# Altium PCB QN9080.PcbDoc
Units mm, origin at the board's own origin, x right, y up, seen from the top; angles counter-clockwise.
Board outline 37.46 x 44.96 mm, 2 copper layers (Top Layer, Bottom Layer); 28 components, 24 nets, 128 pads, 120 vias.
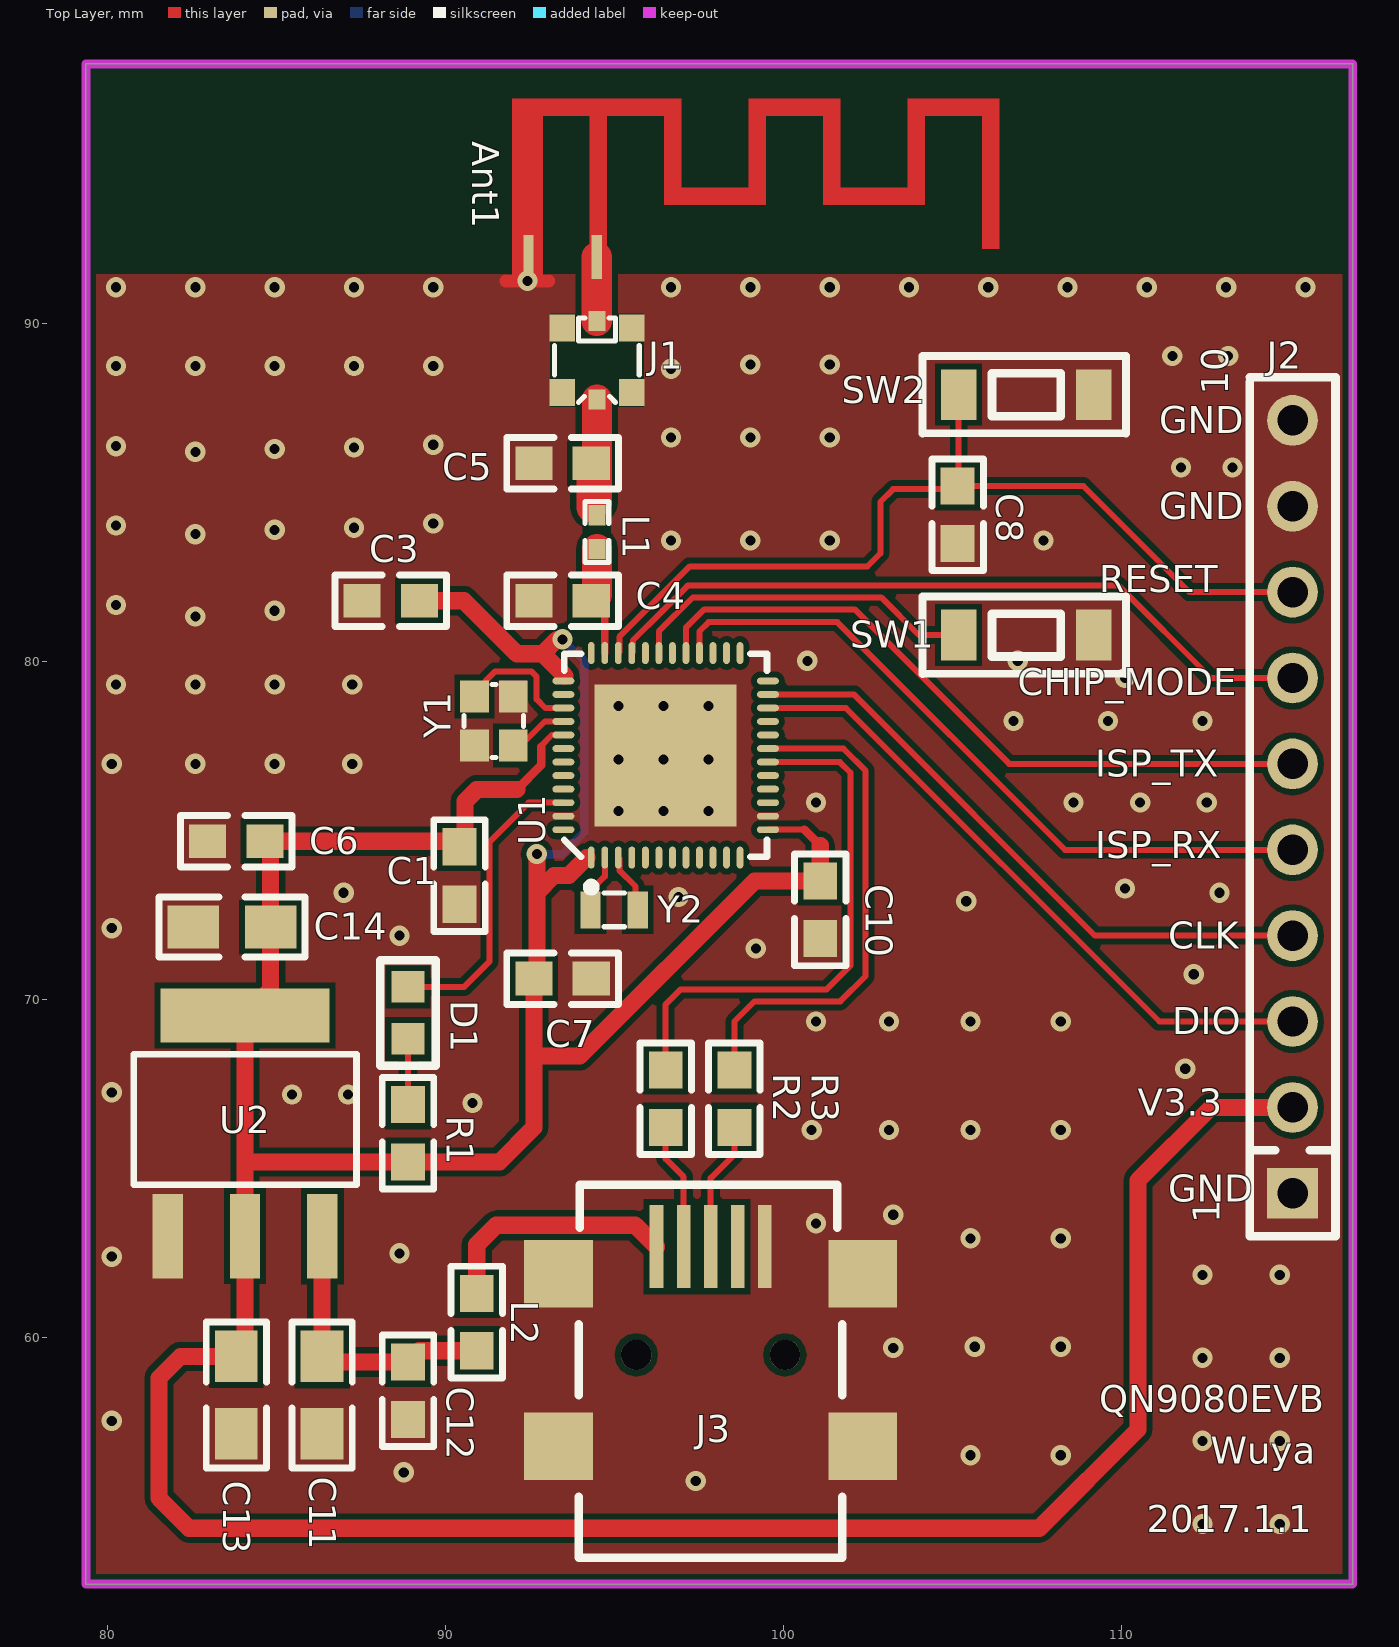
[diagram p0: Top Layer view]
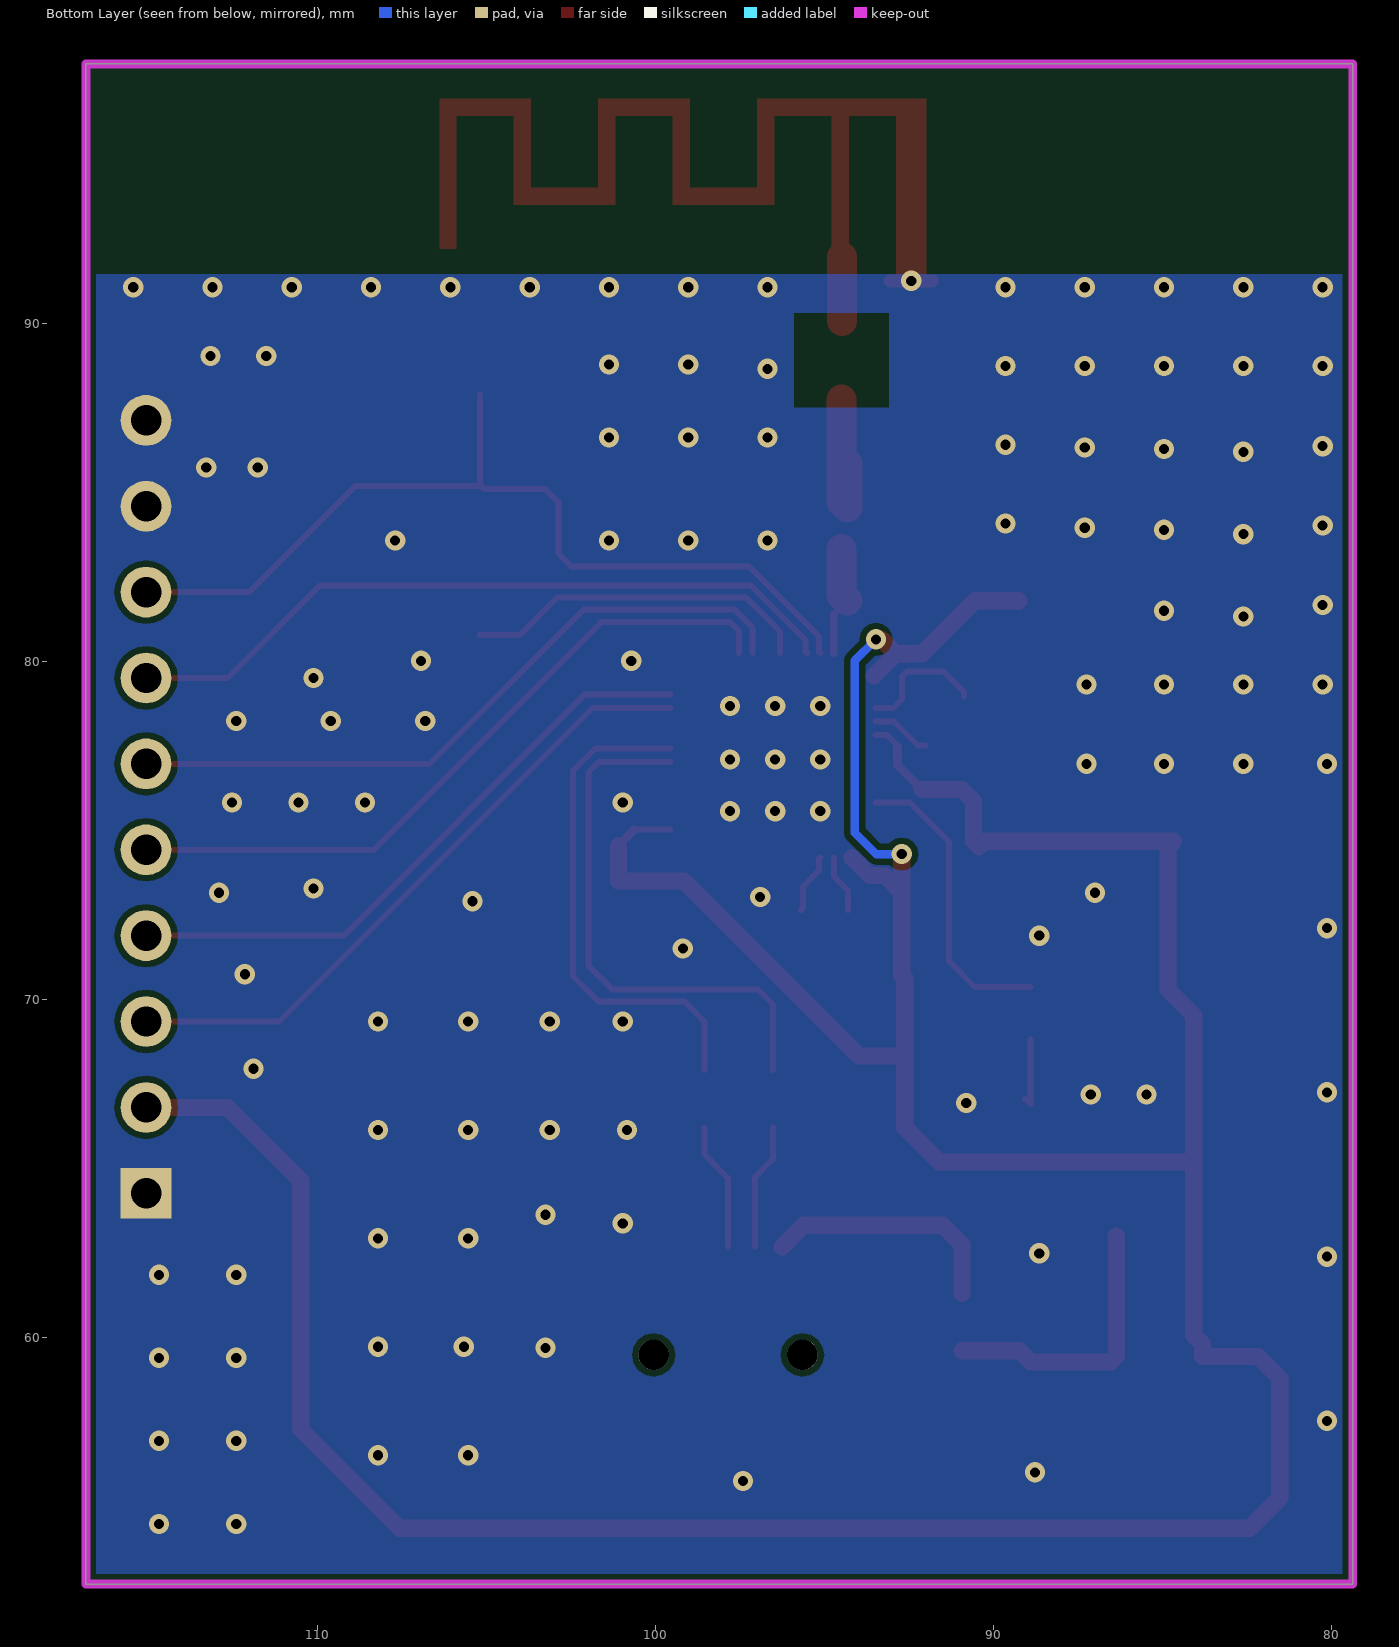
[diagram p1: Bottom Layer view, seen from below]

## Layer stack, top to bottom
Top Layer: signal copper 0.0356
Dielectric: dielectric 0.32, FR-4, Dk 4.8
Bottom Layer: signal copper 0.0356

## Board outline
79.375,97.663 79.375,52.705 116.84,52.705 116.84,97.663

## Design rules (kind name [scope] priority, off if disabled: settings)
Clearance Clearance_1 [(InPolygon)] p1: gap=0.178
Clearance [All] p2: gap=0.178
Length "InNet('USB_DP') Or InNet('USB_DM')" [InNet('USB_DP') Or InNet('USB_DM')] p1: maxlimit=17.78 minlimit=0
MinimumSolderMaskSliver [All] p1: minsoldermaskwidth=0
PolygonConnect [All] p1: connectstyle=Direct reliefconductorwidth=0.254 reliefentries=4 polygonreliefangle="90 Angle"
RoutingVias [All] p1: holewidth=0.711 width=1.27 viastyle="Through Hole" minholewidth=0.711 minwidth=1.27 maxholewidth=0.711 maxwidth=1.27
SilkToSilkClearance [All] p1: silktosilkclearance=0
SilkscreenOverComponentPads [All] p1: minsilkscreentomaskgap=0
SolderMaskExpansion [All] p1: expansion=0.102
TestPointUsage [All] p1: valid=0 allowmultiple=FALSE
Testpoint [All] p1: side=15 testpointundercomponent=TRUE minsize=1.016 maxsize=2.54 preferedsize=1.524 minholesize=0 maxholesize=1.016 preferedholesize=0.813 testpointgrid=0.025 style=1023 order=0123456789
Width [All] p1: maxlimit=1.27 minlimit=0.127 preferedwidth=0.254 minimp=50.000000 maximp=50.000000 favimp=50.000000
21 further rules are at their usual default settings.

## Components (designator, comment, footprint, x,y, rotation, side; value= is the part's Value field where it differs from the comment)
Ant1 "Atenna" ANTENNA_IIFA_1 93.472,91.948 r270 top
C1 "0.1uF" RCL_0603 90.424,73.66 r90 top
C3 "0.1uF" RCL_0603 88.392,81.788 r0 top
C4 "1.8pF" RCL_0603 93.472,81.788 r0 top
C5 "1.8pF" RCL_0603 93.472,85.852 r0 top
C6 "4.7uF" RCL_0603 83.82,74.676 r0 top
C7 "0.1uF" RCL_0603 93.472,70.612 r180 top
C8 "0.1uF" RCL_0603 105.156,84.328 r90 top
C10 "0.1uF" RCL_0603 101.092,72.644 r90 top
C11 "10uF" RCL_0805 86.36,59.436 r270 top
C12 "0.1uF" RCL_0603 88.9,58.42 r90 top
C13 "10uF" RCL_0805 83.82,59.436 r270 top
C14 "10uF" RCL_0805 84.836,72.136 r180 top
D1 "LED" LED_0603 88.9,69.596 r270 top
J1 "MM8130-2600" COAXIAL-SWF 94.488,88.9 r180 top
J2 "CONN-10" HDR_1x10 113.792,75.692 r90 top
J3 "MiniUSB-AB-SMT" USB-Micro-B-RA-SMD-PiP 98.044,57.912 r180 top
L1 "3.3nH" RCL_0402 94.488,83.82 r90 top
L2 "INDUCTOR" RCL_0603 90.932,60.452 r270 top
R1 "470Ω" RCL_0603 88.9,66.04 r270 top
R2 "22Ω" RCL_0603 96.52,67.056 r270 top
R3 "22Ω" RCL_0603 98.552,67.056 r270 top
SW1 "Button" E-Switch 107.188,80.772 r0 top
SW2 "Button" E-Switch 107.188,87.884 r0 top
U1 "QN9080" QN9080QFN48pin 96.52,77.216 r90 top
U2 "AM1117" SOT-223 81.788,62.992 r90 top
Y1 "32M" BT-XTAL_2016 91.44,78.232 r90 top
Y2 "32.768Khz" XTAL32K_2012 94.996,72.644 r180 top

## Footprints (in the part's own frame and the unit in brackets; to place one, negate y for a bottom-side part, rotate by r counter-clockwise, add the part's x,y. Pads: shape width x height; smd on the part's side, far side on the other; paste and mask are expansions set on the pad)
ANTENNA_IIFA_1 [mm]
  rect 1.3x0.3 smd paste+0 mask-0.3: 1(0,1.01) 2(0,-1.01)
  Top Layer region: -4.69,8.21 -1.55,8.21 -1.55,7.71 -4.69,7.71
  Top Layer region: -4.69,5.51 -4.19,5.51 -4.19,8.21 -4.69,8.21
  Top Layer region: -2.05,3.01 -1.55,3.01 -1.55,6.01 -2.05,6.01
  Top Layer region: -1.55,3.01 -4.69,3.01 -4.69,3.51 -1.55,3.51
  Top Layer region: -2.05,7.71 -1.55,7.71 -1.55,10.71 -2.05,10.71
  Top Layer region: -1.55,10.71 -4.69,10.71 -4.69,10.21 -1.55,10.21
  Top Layer region: -4.69,10.21 -4.19,10.21 -4.19,12.91 -4.69,12.91
  Top Layer region: -1.55,6.01 -4.69,6.01 -4.69,5.51 -1.55,5.51
  Top Layer region: -4.69,-1.49 0.7,-1.49 0.7,-0.59 -4.69,-0.59
  Top Layer region: -4.69,12.91 -0.25,12.91 -0.25,12.41 -4.69,12.41
  Top Layer region: -4.69,0.81 0.7,0.81 0.7,1.31 -4.69,1.31
  Top Layer region: -4.69,-1.49 -4.19,-1.49 -4.19,3.51 -4.69,3.51
BT-XTAL_2016 [mm] "Crystal 2.0 x 1.6 mm"
  rect 0.95x0.85 smd: 1(-0.725,-0.575) 2(0.725,-0.575) 3(0.725,0.575) 4(-0.725,0.575)
  silkscreen extent -1.08,-0.88 1.08,0.88, body extent -1.05,-0.85 1.05,0.85, height 0.56
COAXIAL-SWF [mm]
  rect 0.5x0.58 smd: 1(0,1.16) 3(0,-1.16)
  rect 0.75x0.8 smd: 2(-1.025,0.95) 2(-1.025,-0.95) 2(1.025,0.95) 2(1.025,-0.95)
  Top Layer pour cut-out: 0.65,-0.55 -0.65,-0.55 -0.65,-1.35 0.65,-1.35
  Top Layer pour cut-out: -0.65,0.55 0.65,0.55 0.65,1.35 -0.65,1.35
  silkscreen extent -1.25,-1.25 1.25,1.25
E-Switch [mm]
  rect 1.05x1.5 smd: 1(-2,0) 2(2,0)
  silkscreen extent -3.07,-1.15 2.95,1.14
HDR_1x10 [mm] "Pin Header, 2.54mm through hole"
  rect 1.5x1.5 hole 0.9: 1(-11.43,-1.27)
  round 1.5 hole 0.9: 2(-8.89,-1.27) 3(-6.35,-1.27) 4(-3.81,-1.27) 5(-1.27,-1.27) 6(1.27,-1.27) 7(3.81,-1.27) 8(6.35,-1.27) 9(8.89,-1.27) 10(11.43,-1.27)
  silkscreen extent -12.7,-2.54 12.7,0
LED_0603 [mm] "SMD Super Bright LED, GREEN"
  rect 0.93x0.98 smd: 1(0.77,0) 2(-0.77,0)
  silkscreen extent -1.56,-0.82 1.56,0.82, body extent -0.8,-0.4 0.8,0.4, height 0.6
QN9080QFN48pin [mm]
  rect 4.2x4.2 smd: 0(0,0)
  oval 0.65x0.2 smd: 1(-3.025,2.2) 2(-3.025,1.8) 3(-3.025,1.4) 4(-3.025,1) 5(-3.025,0.6) 6(-3.025,0.2) 7(-3.025,-0.2) 8(-3.025,-0.6) 9(-3.025,-1) 10(-3.025,-1.4) 11(-3.025,-1.8) 12(-3.025,-2.2) 25(3.025,-2.2) 26(3.025,-1.8) 27(3.025,-1.4) 28(3.025,-1) 29(3.025,-0.6) 30(3.025,-0.2) 31(3.025,0.2) 32(3.025,0.6) 33(3.025,1) 34(3.025,1.4) 35(3.025,1.8) 36(3.025,2.2)
  oval 0.2x0.65 smd: 13(-2.2,-3.025) 14(-1.8,-3.025) 15(-1.4,-3.025) 16(-1,-3.025) 17(-0.6,-3.025) 18(-0.2,-3.025) 19(0.2,-3.025) 20(0.6,-3.025) 21(1,-3.025) 22(1.4,-3.025) 23(1.8,-3.025) 24(2.2,-3.025) 37(2.2,3.025) 38(1.8,3.025) 39(1.4,3.025) 40(1,3.025) 41(0.6,3.025) 42(0.2,3.025) 43(-0.2,3.025) 44(-0.6,3.025) 45(-1,3.025) 46(-1.4,3.025) 47(-1.8,3.025) 48(-2.2,3.025)
  silkscreen extent -4.02,-3 3,3, body extent -3,-3 3,3, height 0.9
RCL_0402 [mm] "Chip Capacitor, 2-Leads, Body 1.0x0.5mm, IPC High Density"
  rect 0.6x0.5 smd: 1(-0.5,0) 2(0.5,0)
  silkscreen extent -0.9,-0.35 0.9,0.35, body extent -0.51,-0.25 0.51,0.25, height 0.5
RCL_0603 [mm]
  rect 1.1x1 smd: 1(-0.85,0) 2(0.85,0)
  silkscreen extent -1.65,-0.76 1.65,0.76
RCL_0805 [mil]
  rect 60x50 smd: 1(0,0) 2(90,0)
  silkscreen extent -40,-35 130,35
SOT-223 [mm] "AMS1117"
  rect 2.5x0.9 smd: 1(0,0) 2(0,-2.29) 3(0,-4.58)
  rect 1.6x5 smd: 4(6.528,-2.29)
  silkscreen extent 1.52,-5.59 5.38,1
USB-Micro-B-RA-SMD-PiP [mm] "Micro USB B SMT"
  rect 2.032x2 smd: 0(-4.306,1.129) 0(-4.306,-3.971) 0(4.694,1.129) 0(4.694,-3.971)
  rect 0.4x2.454 smd: 1(1.794,-4.771) 2(0.994,-4.771) 3(0.194,-4.771) 4(-0.606,-4.771) 5(-1.406,-4.771)
  round 0.9 hole 0.9: 10(-2.006,-1.571) 11(2.394,-1.571)
  silkscreen extent -3.71,-6.6 4.09,4.43
XTAL32K_2012 [mm] "XTAL SMD 2.0 x 1.2 mm"
  rect 0.6x1.1 smd: 1(-0.7,0) 2(0.7,0)
  silkscreen extent -0.3,-0.5 0.3,0.5

## Part data
C1 C3 C4 C5 C6 C7 C8 C10 C12: library part C, "Capacitor"
C11 C13 C14: library part CAP_Pol2
J1: library part Coaxial-Internal-SW, "Coaxial Connector with Switch"
J2: "Pin List 1x10, 2.54mm (100mil), SMD"
J3: "MicroUSB-B-SMT"
L1: library part INDUCTOR
R1 R2 R3: library part Resitor
Y1: library part Cystal_32Mhz
Y2: library part Cystal_32Khz

## Via types
v1: diameter 0.6, hole 0.3, Top Layer to Bottom Layer, tented both sides, 120 vias

## Nets (pads, with @x,y where several pads share a name; then routed paths per layer and width w, separated by ;. In a path a pad name is that pad's centre, name@x,y a point inside that pad or via, vN(x,y) a via of type N, cw(c..) or ccw(c..) an arc to the next point about the centre after c; other vN are vias at no path point)
CHIP_MODE: J2.7 U1.33 | length 22.7
  Top Layer w0.178: U1.33 95.553,80.274 95.553,80.618 96.431,81.496 ; 97.155,82.22 96.431,81.496 ; J2.7 112.649,79.502 109.906,82.245 97.181,82.245 96.431,81.496
GND: Ant1.2 C1.1 C3.1 C4.1 C5.1 C6.1 C7.1 C8.1 C10.1 C11.2 C12.1 C13.2 C14.2 J1.2 J2.1 J2.9 J2.10 J3.0 J3.5 SW1.2 SW2.2 U1.0 U1.14 U1.47 U2.1 Y1.2 Y1.4 | length 1.3
  Top Layer w0.381: 91.801,91.248 v1(92.432,91.248) 93.063,91.248
  other v1: 112.395,54.483 114.681,54.483 97.409,55.753 88.773,56.007 105.537,56.515 108.204,56.515 112.395,56.938 114.681,56.938 80.137,57.531 112.395,59.394 114.681,59.394 103.251,59.69 105.664,59.722 108.204,59.722 112.395,61.849 114.681,61.849 80.137,62.389 88.646,62.484 105.537,62.928 108.204,62.928 100.965,63.373 103.251,63.627 100.838,66.135 103.124,66.135 105.537,66.135 108.204,66.135 90.805,66.929 85.471,67.183 87.122,67.183 80.137,67.246 111.887,67.945 100.965,69.342 103.124,69.342 105.537,69.342 108.204,69.342 112.141,70.739 99.187,71.501 88.646,71.882 80.137,72.104 105.41,72.898 96.901,73.025 86.995,73.152 112.903,73.152 110.109,73.279 95.123,75.565 96.456,75.565 97.79,75.565 100.965,75.819 108.585,75.819 110.553,75.819 112.522,75.819 80.137,76.962 82.609,76.962 84.955,76.962 87.249,76.962 95.123,77.089 96.456,77.089 97.79,77.089 106.807,78.232 109.601,78.232 112.395,78.232 95.123,78.676 96.456,78.676 97.79,78.676 80.264,79.311 82.609,79.311 84.955,79.311 87.249,79.311 110.109,79.502 100.711,80.01 106.934,80.01 82.609,81.322 84.955,81.492 80.264,81.661 96.681,83.566 99.026,83.566 101.371,83.566 107.696,83.566 82.609,83.756 84.955,83.883 87.3,83.947 80.264,84.01 89.645,84.074 111.76,85.725 113.284,85.725 82.609,86.191 84.955,86.275 87.3,86.318 80.264,86.36 89.645,86.402 96.681,86.614 99.026,86.614 101.371,86.614 96.681,88.646 80.264,88.731 82.609,88.731 84.955,88.731 87.3,88.731 89.645,88.731 99.026,88.773 101.371,88.773 111.506,89.027 113.157,89.027 80.264,91.059 82.609,91.059 84.955,91.059 87.3,91.059 89.645,91.059 96.681,91.059 99.026,91.059 101.371,91.059 103.717,91.059 106.062,91.059 108.407,91.059 110.752,91.059 113.098,91.059 115.443,91.059
ISP_RXD: J2.5 U1.28 | length 21.1
  Top Layer w0.178: U1.28 97.52,80.883 97.79,81.153 101.6,81.153 108.331,74.422 J2.5
ISP_TXD: J2.6 U1.29 | length 20.8
  Top Layer w0.178: U1.29 97.12,80.991 97.663,81.534 102.108,81.534 106.68,76.962 J2.6
NetAnt1_1: Ant1.1 J1.3 | length 1.9
  Top Layer w0.254: J1.3@94.482,90.066 J1.3
  Top Layer w0.889: J1.3@94.482,90.066 Ant1.1
NetC4_2: C4.2 L1.1 U1.35 | length 3.8
  Top Layer w0.178: C4.2 C4.2@94.72,81.39 ; L1.1 L1.1@94.654,83.154 ; C4.2@94.654,81.788 C4.2@94.72,81.722
  Top Layer w0.229: U1.35 C4.2@94.72,81.39
  Top Layer w0.508: C4.2@94.322,81.672 C4.2
  Top Layer w0.889: C4.2 94.488,81.954 L1.1
NetC5_2: C5.2 J1.1 L1.2 | length 4.6
  Top Layer w0.889: C5.2 94.322,84.543 94.488,84.709 J1.1
NetD1_1: D1.1 R1.1 | length 2.2
  Top Layer w0.178: D1.1 R1.1 R1.1@89.066,67.056
NetJ3_1: J3.1 L2.1 | length 7.3
  Top Layer w0.508: L2.1 90.932,62.738 91.509,63.315 95.618,63.315 J3.1
NetJ3_2: J3.2 R2.2 | length 3.7
  Top Layer w0.178: R2.2 96.52,65.278 97.05,64.748 J3.2
NetJ3_3: J3.3 R3.2 | length 3.8
  Top Layer w0.178: J3.3 97.85,64.71 98.544,65.405 98.552,65.405 R3.2
NetU1_39: U1.39 Y1.3 | length 3.9
  Top Layer w0.178: Y1.3 90.865,79.084 91.48,79.699 92.55,79.699 92.707,79.542 92.707,78.87 92.961,78.616 U1.39
NetU1_40: U1.40 Y1.1 | length 1.8
  Top Layer w0.178: Y1.1 92.239,77.507 92.948,78.216 U1.40
P5V_USB: C11.1 C12.2 L2.2 U2.3 | length 8.3
  Top Layer w0.508: U2.3 86.36,62.984 C11.1 86.526,59.27 C12.2 89.232,59.602 L2.2
PA08_LED: D1.2 U1.46 | length 8.9
  Top Layer w0.178: D1.2 90.559,70.366 91.313,71.12 91.313,74.663 92.466,75.816 U1.46
PA08_SW1: SW1.1 U1.31 | length 10.4
  Top Layer w0.178: U1.31 96.32,80.882 97.328,81.89 102.895,81.89 104.013,80.772 SW1.1
RESET: C8.2 J2.8 SW2.1 U1.34 | length 27.2
  Top Layer w0.178: U1.34 95.153,80.274 95.153,80.721 97.237,82.804 102.489,82.804 102.87,83.185 102.87,84.709 103.251,85.09 105.068,85.09 C8.2 ; SW2.1 105.188,85.21 C8.2 ; J2.8 112.014,82.042 108.878,85.178 C8.2
SWD_CLK: J2.4 U1.23 | length 18.5
  Top Layer w0.178: U1.23 102.086,79.016 109.22,71.882 J2.4
SWD_DIO: J2.3 U1.22 | length 19.4
  Top Layer w0.178: U1.22 101.851,78.616 111.125,69.342 J2.3
USB_DM: R2.1 U1.18 | length 16.2
  Top Layer w0.178: R2.1 96.52,69.85 96.962,70.292 101.28,70.292 101.981,70.993 101.981,76.708 101.673,77.016 U1.18
USB_DP: R3.1 U1.19 | length 16.1
  Top Layer w0.178: R3.1 98.552,69.342 99.147,69.937 101.687,69.937 102.438,70.688 102.438,74.041 ; U1.19 101.776,77.416 102.438,76.754 102.438,76.2 ; 102.438,74.686 102.438,74.041 ; 102.438,75.819 102.438,76.2 ; 102.438,74.041 102.438,76.2
V3.3: C1.2 C3.2 C6.2 C7.2 C10.2 C13.1 C14.1 J2.2 R1.2 U1.1 U1.13 U1.37 U1.41 U2.2 U2.4 | length 122.7
  Top Layer w0.178: 92.837,77.47 92.837,77.502 93.151,77.816 U1.41 ; U1.13 100.625,75.016
  Top Layer w0.254: 92.114,76.2 92.837,76.923 92.837,77.47 ; 100.625,75.016 101.092,74.549
  Top Layer w0.508: C3.2 90.551,81.788 92.12,80.219 92.882,80.219 ; C1.2@90.258,74.676 C6.2 84.836,74.51 C14.1 84.836,70.278 U2.4 84.078,65.278 ; C1.2 90.59,74.676 90.59,75.858 90.932,76.2 92.114,76.2 ; v1(92.71,74.295) 92.71,73.152 ; v1(93.472,80.645) 93.307,80.645 92.882,80.219 ; 93.535,79.566 92.882,80.219 ; 94.188,74.191 93.657,73.66 93.218,73.66 92.71,73.152 ; 101.092,74.549 C10.2 99.148,73.494 93.98,68.326 92.622,68.326 ; J2.2 J2.2@114.935,66.802 ; J2.2@115.189,67.056 J2.2@114.935,66.802 ; 84.078,65.278 U2.2 84.078,60.067 83.82,59.809 C13.1 82.169,59.436 81.534,58.801 81.534,55.245 82.423,54.356 107.569,54.356 110.49,57.277 110.49,64.643 112.649,66.802 J2.2@114.935,66.802 ; 84.078,65.278 84.166,65.19 R1.2 91.606,65.19 92.622,66.206 92.622,68.326 ; 92.622,68.326 C7.2 92.71,70.7 92.71,73.152
  Bottom Layer w0.254: v1(92.71,74.295) 93.472,74.295 94.107,74.93 94.107,80.01 v1(93.472,80.645)
XTAL32_IN: U1.2 Y2.2 | length 1.7
  Top Layer w0.178: Y2.2 94.296,73.214 94.72,73.638 U1.2
XTAL32_OUT: U1.3 Y2.1 | length 1.8
  Top Layer w0.178: U1.3 95.153,74.158 95.153,73.814 95.631,73.336 95.631,72.709 Y2.1
pads on no net: J3.4 J3.10 J3.11 U1.4 U1.5 U1.6 U1.7 U1.8 U1.9 U1.10 U1.11 U1.12 U1.15 U1.16 U1.17 U1.20 U1.21 U1.24 U1.25 U1.26 U1.27 U1.30 U1.32 U1.36 U1.38 U1.42 U1.43 U1.44 U1.45 U1.48

## Polygon pours and split planes (outlines as drawn)
GND on Top Layer "GND" (solid, remove dead copper): 79.375,91.44 116.84,91.44 116.84,52.705 79.375,52.705 79.375,91.44
GND on Bottom Layer "GND" (solid, remove dead copper): 79.375,91.44 116.84,91.44 116.84,52.705 79.375,52.705 79.375,91.44

## Keep-outs
Keep-Out Layer:
  lines w0.254: 79.375,52.705 116.84,52.705 ; 79.375,52.705 116.84,52.705 ; 79.375,52.705 79.375,97.663 80.01,97.663 116.84,97.663 116.84,52.705

## Other copper
Top Layer:
  pour cut-out: 93.091,90.297 95.885,90.297 95.885,87.503 93.091,87.503
Bottom Layer:
  pour cut-out: 93.091,90.297 95.885,90.297 95.885,87.503 93.091,87.503

## Silkscreen, mask and mechanical layers (free items; w line width, h text height)
Top Overlay:
  text "10" at 113.157,87.884 h0.8 r90
  text "GND" at 111.125,86.741 h0.8
  text "GND" at 111.125,84.201 h0.8
  text "RESET" at 109.347,82.042 h0.8
  text "CHIP_MODE" at 106.934,78.994 h0.8
  text "ISP_TX" at 109.22,76.581 h0.8
  text "ISP_RX" at 109.22,74.168 h0.8
  text "CLK" at 111.379,71.501 h0.8
  text "DIO" at 111.506,68.961 h0.8
  text "V3.3" at 110.49,66.548 h0.8
  text "GND" at 111.379,64.008 h0.8
  text "1" at 112.903,63.373 h0.8 r90
  text "QN9080EVB" at 109.347,57.785 h0.8
  text "Wuya" at 112.649,56.261 h0.8
  text "2017.1.1" at 110.744,54.229 h0.8